# EAGLE board buffered mult panel (EAGLE 7.3.0)
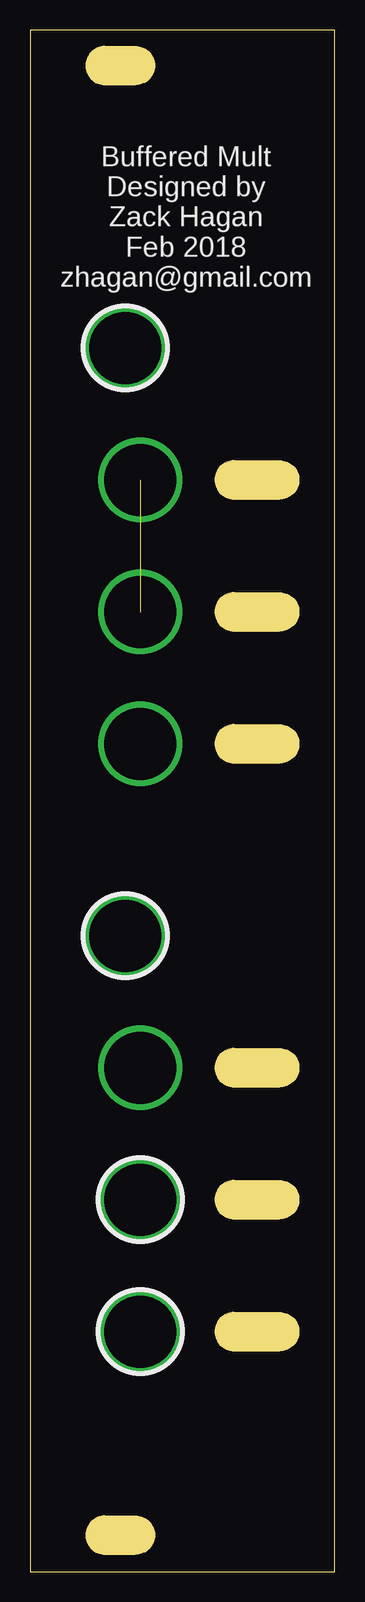
[diagram p0: board, top side]
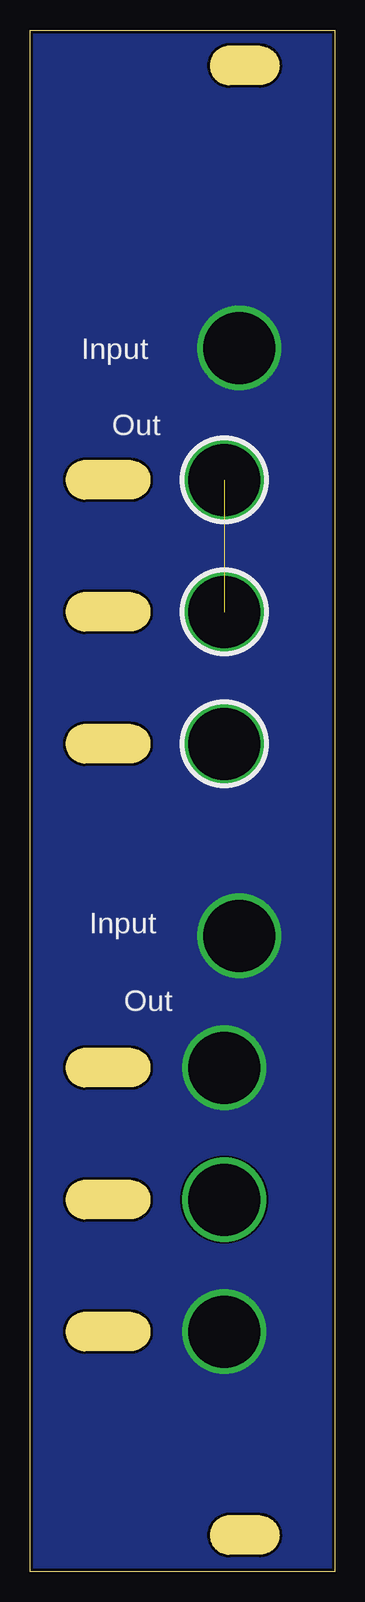
[diagram p1: board, bottom side, seen from below]

Size 25.4 x 128.5 mm. Coordinates in mm from the lower left corner, seen from the top.
Outline: 0,128.5 0,0 25.4,0 25.4,128.5 0,128.5
Copper layers (1*2*15*16): Top 0.035mm / dielectric 0.2mm / Route2 0.0175mm / dielectric 1.1mm / Route15 0.0175mm / dielectric 0.2mm / Bottom 0.035mm
Design rules "SeeedStudio_DRU_no_angle_20130527": minimum track width 6mil, minimum drill 12mil, track to track 6mil, track to pad 6mil, pad to pad 6mil, via to via 6mil, smd to smd 0mil, copper to edge 10mil, drill to drill 10mil, minimum pad ring 6mil, minimum via ring 6mil, stop-mask expansion 2mil, vias tented up to drill 25mil, thermal gap 10mil
Net classes: 1 power: width 0.406 mm; 2 ground: width 0.305 mm

## Placement (x,y rotation side)
U$1  [TRIMMERHOLE]  17,31 0 top
U$2  [TRIMMERHOLE]  17,20 0 top
U$3  [SLOT_HOLE]  7.52,125.53 0 top
U$4  [SLOT_HOLE]  7.52,3.04 0 top
U$5  [TRIMMERHOLE]  17,42 0 top
U$6  [TRIMMERHOLE]  17,69 0 top
U$7  [TRIMMERHOLE]  17,80 0 top
U$8  [TRIMMERHOLE]  17,91 0 top

## Library data of the parts
U$1-U$8 = MusicThingModular

## Tracks (layer width: path | path; a pad name or v marks a point on that pad's centre or on a via)
GND  (via drill 6)
  other vias: 9.2,20 7.95,53 7.95,102 9.2,42
  pour Bottom: 30.56,131.31 29.1,-3.95 -2.86,-4.95 -3.4,130.31
GND1  (via drill 6)
  other vias: 9.2,31
N$1  (via drill 6)  (1 unrouted)
  other vias: 9.2,91 9.2,80
N$2  (via drill 6)
  other vias: 9.2,69

## Text on the board
tNames: Buffered Mult / Designed by / Zack Hagan / Feb 2018 / zhagan@gmail.com
bNames: Input | Out | Input | Out
bStop: Buffered / Mult